# EAGLE board ghettoduino-P (EAGLE 6.1)
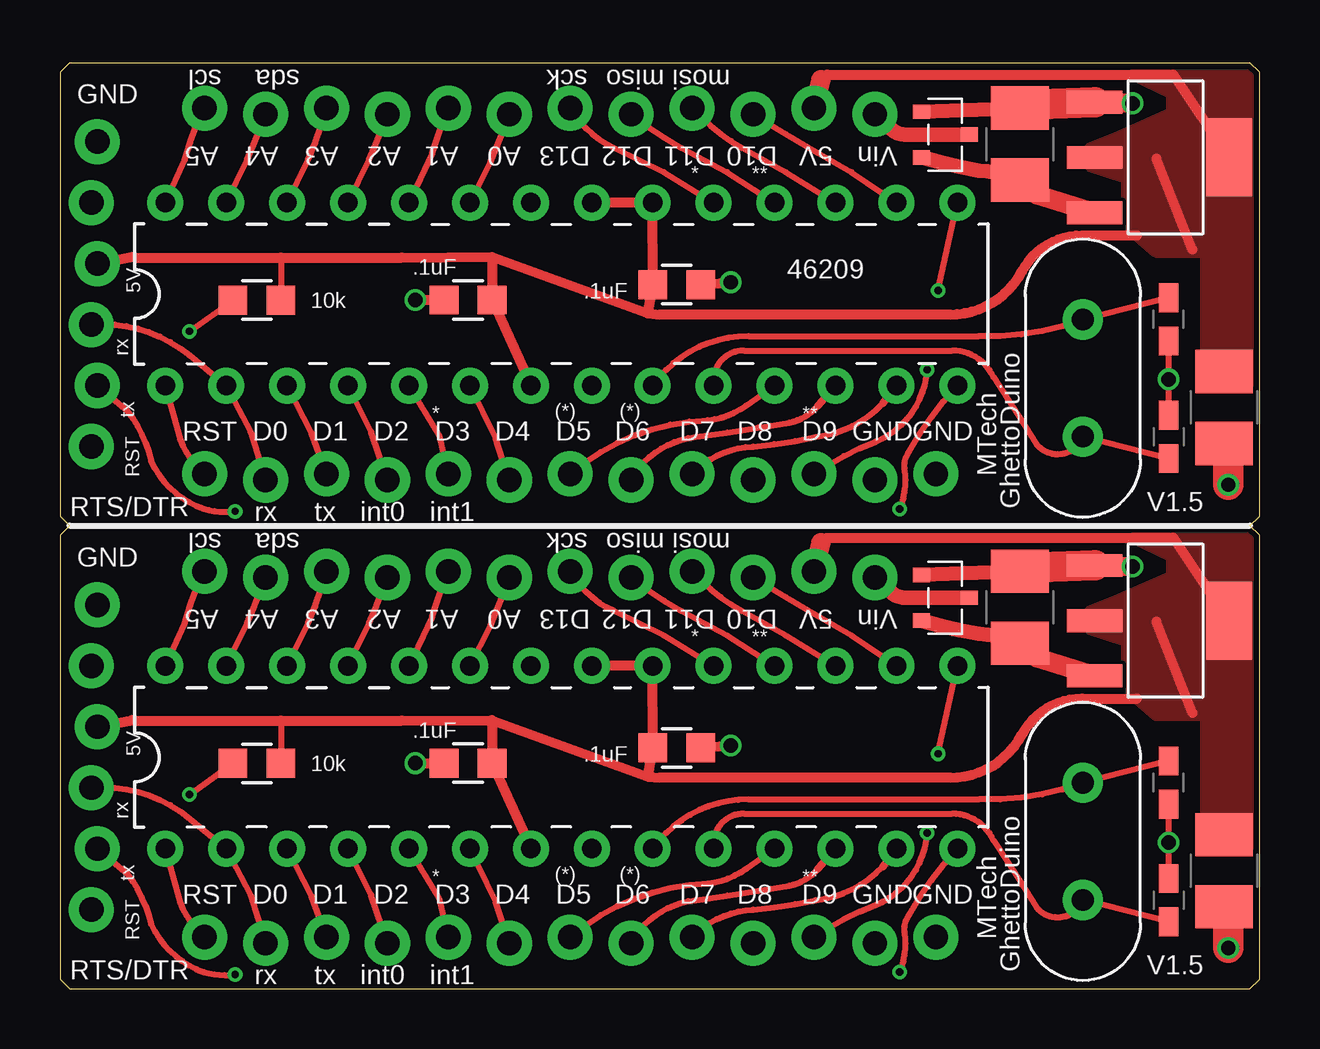
[diagram p0: board, top side]
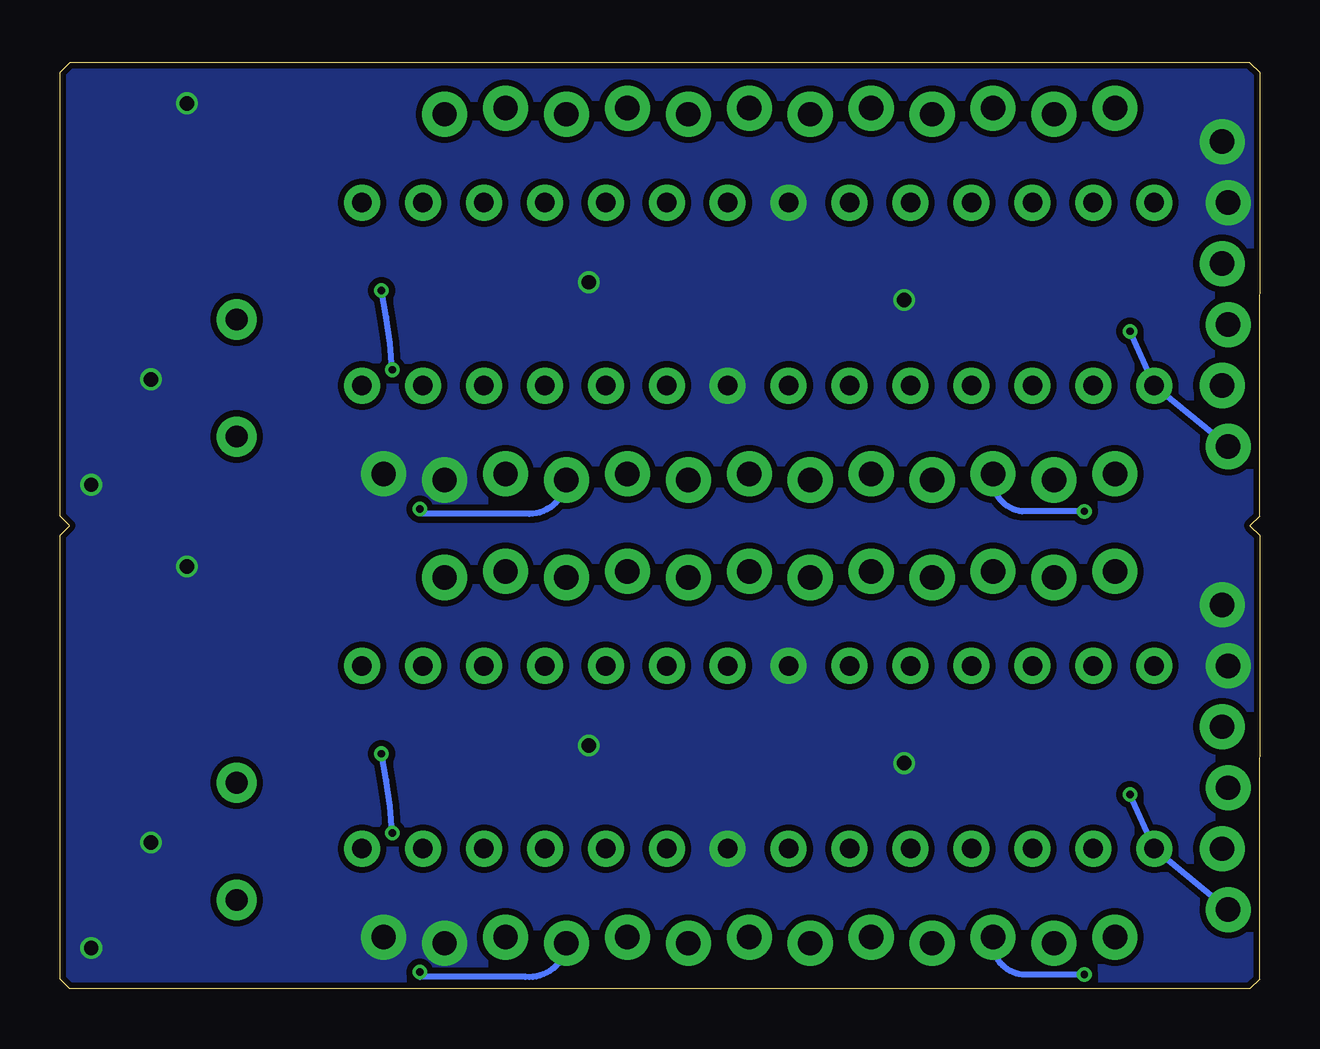
[diagram p1: board, bottom side, seen from below]

Size 50 x 38.6 mm. Coordinates in mm from the lower left corner, seen from the top.
Outline: 0.4,19.3 0,18.9 0,0.4
Outline: 0.4,0 0.4,0
Outline: 0.4,0 49.6,0
Outline: 50,0.4 50,0.4
Outline: 50,0.4 50,18.9 49.6,19.3 50,19.7
Outline: 49.6,0 50,0.4
Outline: 0,0.4 0.4,0
Outline: 0,19.7 0,38.2 0.4,38.6 49.6,38.6 50,38.2 50,19.7
Outline: 0.4,19.3 0.4,19.3
Outline: 50,19.7 50,19.7
Outline: 0,19.7 0.4,19.3
Copper layers (1*16): Top 0.035mm / dielectric 1.5mm / Bottom 0.035mm
Design rules: minimum track width 6mil, minimum drill 12mil, track to track 6mil, track to pad 6mil, pad to pad 6mil, via to via 6mil, smd to smd 0mil, copper to edge 10mil, drill to drill 10mil, minimum pad ring 10mil, minimum via ring 6mil, stop-mask expansion 2mil, vias tented up to drill 100mil, thermal gap 10mil

## Footprints (pad centres in the part's own frame; a part is rotated, then mirrored left to right if it is on the bottom)
ZLDO1117 = smd 0.95 x 2.3: 1 -2.3,-3; 2 0,-3; 3 2.3,-3 | smd 3.25 x 1.9: 4 0,2.6
0603-CAP = smd 1.2 x 0.8: 1 -0.9,0; 2 0.9,0
0805 = smd 1.2 x 1.2: 1 -1,0; 2 1,0
1206 = smd 1.8 x 2.4: 1 -1.5,0; 2 1.5,0
DIL28-3 = drill 0.813 pad 1.5: 1 -16.51,-3.81; 2 -13.97,-3.81; 3 -11.43,-3.81; 4 -8.89,-3.81; 5 -6.35,-3.81; 6 -3.81,-3.81; 7 -1.27,-3.81; 8 1.27,-3.81; 9 3.81,-3.81; 10 6.35,-3.81; 11 8.89,-3.81; 12 11.43,-3.81; 13 13.97,-3.81; 14 16.51,-3.81; 15 16.51,3.81; 16 13.97,3.81; 17 11.43,3.81; 18 8.89,3.81; 19 6.35,3.81; 20 3.81,3.81; 21 1.27,3.81; 22 -1.27,3.81; 23 -3.81,3.81; 24 -6.35,3.81; 25 -8.89,3.81; 26 -11.43,3.81; 27 -13.97,3.81; 28 -16.51,3.81
1X06_LOCK = drill 1.016 pad 1.88: 1 0,0.127; 2 2.54,-0.127; 3 5.08,0.127; 4 7.62,-0.127; 5 10.16,0.127; 6 12.7,-0.127
HC49US = drill 0.9 pad 1.676: 1 -2.44,0; 2 2.44,0
1X13_LOCK = drill 1.016 pad 1.88: 1 0,0.127; 2 2.54,-0.127; 3 5.08,0.127; 4 7.62,-0.127; 5 10.16,0.127; 6 12.7,-0.127; 7 15.24,0.127; 8 17.78,-0.127; 9 20.32,0.127; 10 22.86,-0.127; 11 25.4,0.127; 12 27.94,-0.127; 13 30.48,0.127
SOT23-3LEAD = smd 0.6 x 0.7: 1 0.95,1; 2 -0.95,1; 3 0,-1
1X12_LOCK = drill 1.016 pad 1.88: 1 0,0.127; 2 2.54,-0.127; 3 5.08,0.127; 4 7.62,-0.127; 5 10.16,0.127; 6 12.7,-0.127; 7 15.24,0.127; 8 17.78,-0.127; 9 20.32,0.127; 10 22.86,-0.127; 11 25.4,0.127; 12 27.94,-0.127

## Placement (x,y rotation side)
5V  5V-LDO-ZLDO1117  [ZLDO1117]  46.13,15.35 270 top
5V1  5V-LDO-ZLDO1117  [ZLDO1117]  46.13,34.65 270 top
C1  18pF  [0603-CAP]  46.21,8.6 90 top
C2  .1uF  [0805]  25.71,10.05 180 top
C3  18pF  [0603-CAP]  46.21,3.7 270 top
C4  .1uF  [0805]  17.01,9.41 180 top
C5  10uF  [1206]  48.51,4.93 270 top
C6  18pF  [0603-CAP]  46.21,23 270 top
C7  18pF  [0603-CAP]  46.21,27.9 90 top
C8  10uF  [1206]  40.01,15.9 90 top
C9  .1uF  [0805]  25.71,29.35 180 top
C10  .1uF  [0805]  17.01,28.71 180 top
C11  10uF  [1206]  48.51,24.23 270 top
C12  10uF  [1206]  40.01,35.2 90 top
IC1  [DIL28-3]  20.9,9.65 0 top
IC2  [DIL28-3]  20.9,28.95 0 top
JP1  [1X06_LOCK]  1.43,3.3 90 top
JP2  [1X06_LOCK]  1.43,22.6 90 top
R1  10k  [0805]  8.21,9.4 180 top
R2  10k  [0805]  8.21,28.7 180 top
U$1  HC49US  [HC49US]  42.63,6.15 270 top
U$2  M12  [1X13_LOCK]  6.03,2.03 0 top
U$3  P-MOSFET-PMV48XP  [SOT23-3LEAD]  36.9,16.3 90 top
U$4  HC49US  [HC49US]  42.63,25.45 270 top
U$5  M12  [1X12_LOCK]  6.03,17.27 0 top
U$6  M12  [1X13_LOCK]  6.03,21.33 0 top
U$7  M12  [1X12_LOCK]  6.03,36.57 0 top
U$8  P-MOSFET-PMV48XP  [SOT23-3LEAD]  36.9,35.6 90 top

## Library data of the parts
5V 5V1 C1-C12 IC1 IC2 JP1 JP2 R1 R2 U$1-U$8 = 1dah

## Nets
5V: 5V.2 5V.4 C2.2 C4.1 C5.1 IC1.7 IC1.20 IC1.21 JP1.4 R1.1 U$5.11
5V1: 5V1.2 5V1.4 C9.2 C10.1 C11.1 IC2.7 IC2.20 IC2.21 JP2.4 R2.1 U$7.11
A0: IC1.23 U$5.6
A1: IC1.24 U$5.5
A2: IC1.25 U$5.4
A3: IC1.26 U$5.3
A4: IC1.27 U$5.2
A5: IC1.28 U$5.1
A6: IC2.28 U$7.1
A7: IC2.27 U$7.2
A8: IC2.26 U$7.3
A9: IC2.25 U$7.4
A10: IC2.24 U$7.5
A11: IC2.23 U$7.6
D0: IC1.2 JP1.3 U$2.2
D1: IC1.3 JP1.2 U$2.3
D2: IC1.4 U$2.4
D3: IC1.5 U$2.5
D4: IC1.6 U$2.6
D5: IC1.11 U$2.7
D6: IC1.12 U$2.8
D7: IC1.13 U$2.9
D8: IC1.14 U$2.10
D9: IC1.15 U$2.11
D10: IC1.16 U$5.10
D11: IC1.17 U$5.9
D12: IC1.18 U$5.8
D13: IC1.19 U$5.7
D14: IC2.4 U$6.4
D15: IC2.5 U$6.5
D16: IC2.6 U$6.6
D17: IC2.11 U$6.7
D18: IC2.12 U$6.8
D19: IC2.13 U$6.9
D20: IC2.14 U$6.10
D21: IC2.15 U$6.11
D22: IC2.16 U$7.10
D23: IC2.17 U$7.9
D24: IC2.18 U$7.8
D25: IC2.19 U$7.7
D26: IC2.2 JP2.3 U$6.2
D27: IC2.3 JP2.2 U$6.3
GND: 5V.1 C1.1 C2.1 C3.1 C4.2 C5.2 C8.2 IC1.8 IC1.22 JP1.5 JP1.6 U$2.12 U$2.13 U$3.1
GND1: 5V1.1 C6.1 C7.1 C9.1 C10.2 C11.2 C12.2 IC2.8 IC2.22 JP2.5 JP2.6 U$6.12 U$6.13 U$8.1
N$1: U$3.3 U$5.12
N$2: U$7.12 U$8.3
RESET: IC1.1 JP1.1 R1.2 U$2.1
RESET1: IC2.1 JP2.1 R2.2 U$6.1
VIN: 5V.3 C8.1 U$3.2
VIN1: 5V1.3 C12.1 U$8.2
XTAL_N: C3.2 IC1.10 U$1.2
XTAL_N1: C6.2 IC2.10 U$4.2
XTAL_P: C1.2 IC1.9 U$1.1
XTAL_P1: C7.2 IC2.9 U$4.1

## Tracks (layer width: path | path; a pad name or v marks a point on that pad's centre or on a via)
5V
  Top 0.254: 9.21,11.18 R1.1
  Top 0.406: 18.01,11.2 14.24,11.18 9.21,11.18 3.12,11.18 3,11.2 JP1.4 | 18.01,11.2 C4.1 IC1.7 | IC1.21 IC1.20 C2.2 24.51,8.85 | 18.01,11.2 24.51,8.85 | 31.73,18.59 arc-53 31.98,18.8 46.4,18.8 5V.4 | 24.51,8.85 25,8.8 37.1,8.8 arc62 40.1,10.6 arc-62 42.6,12.1 44.9,12.1 | 47.2,11.5 45.7,15.3
  Top 0.813: 31.73,18.59 U$5.11
  pour Top (no thermals): 44.16,16.26 42.89,15.75 42.89,14.99 44.42,14.49 44.42,12.46 45.68,11.38 47.71,11.38 47.71,5.93 49.59,5.93 49.59,18.8 44.66,18.8 46.31,18 46.31,17.2
5V1
  Top 0.254: 9.21,30.48 R2.1
  Top 0.406: 18.01,30.5 14.24,30.48 9.21,30.48 3.12,30.48 3,30.5 JP2.4 | 18.01,30.5 C10.1 IC2.7 | IC2.21 IC2.20 C9.2 24.51,28.15 | 18.01,30.5 24.51,28.15 | 31.73,37.89 arc-53 31.98,38.1 46.4,38.1 5V1.4 | 24.51,28.15 25,28.1 37.1,28.1 arc62 40.1,29.9 arc-62 42.6,31.4 44.9,31.4 | 47.2,30.8 45.7,34.6
  Top 0.813: 31.73,37.89 U$7.11
  pour Top (no thermals): 44.16,35.56 42.89,35.05 42.89,34.29 44.42,33.79 44.42,31.76 45.68,30.68 47.71,30.68 47.71,25.23 49.59,25.23 49.59,38.1 44.66,38.1 46.31,37.3 46.31,36.5
A0
  Top 0.254: IC1.23 17.96,15.14 arc4 U$5.6
A1
  Top 0.254: IC1.24 15.52,15.49 arc-3 U$5.5
A2
  Top 0.254: IC1.25 12.88,15.24 arc4 U$5.4
A3
  Top 0.254: IC1.26 10.34,15.24 arc10 U$5.3
A4
  Top 0.254: IC1.27 7.8,15.24 arc4 U$5.2
A5
  Top 0.254: IC1.28 5.2,15.24 arc-11 U$5.1
A6
  Top 0.254: IC2.28 5.2,34.54 arc-11 U$7.1
A7
  Top 0.254: IC2.27 7.8,34.54 arc4 U$7.2
A8
  Top 0.254: IC2.26 10.34,34.54 arc10 U$7.3
A9
  Top 0.254: IC2.25 12.88,34.54 arc4 U$7.4
A10
  Top 0.254: IC2.24 15.52,34.79 arc-3 U$7.5
A11
  Top 0.254: IC2.23 17.96,34.44 arc4 U$7.6
D0
  Top 0.254: U$2.2 7.94,3.91 IC1.2 5.4,7.1 arc44 JP1.3
D1  (via drill 0.3)
  Top 0.254: IC1.3 10.49,3.86 U$2.3 | JP1.2 2.8,4.8 arc-25 3.8,2.7 arc46 6,0.7 arc24 v7.3,0.6
  Bottom 0.254: v7.3,0.6 9.9,0.6 arc92 U$2.3
D2
  Top 0.254: IC1.4 12.98,3.91 U$2.4
D3
  Top 0.254: IC1.5 15.82,3.76 U$2.5
D4
  Top 0.254: IC1.6 18.16,3.66 U$2.6
D5
  Top 0.254: IC1.11 28.6,5 arc-30 27,4.4 arc38 U$2.7
D6
  Top 0.254: 31.6,5 arc-38 30.4,4.3 arc-2 26.5,3.7 arc55 U$2.8
  Top 0.305: 31.6,5 IC1.12
D7
  Top 0.254: 34.3,5.1 arc-40 31.5,3.7 arc-7 28.9,3.3 arc44 U$2.9
  Top 0.305: 34.3,5.1 IC1.13
D8  (via drill 0.3)
  Top 0.254: v35,0.7 arc65 35.1,0.9 arc25 35.2,2.4 arc-40 35.4,3.1 arc-13 IC1.14
  Bottom 0.254: v35,0.7 35,0.5 30.6,0.5 arc-90 U$2.10
D9  (via drill 0.3)
  Top 0.254: v36.6,9.8 IC1.15 | v36.15,6.5 arc-64 34,3.5 arc13 U$2.11
  Bottom 0.254: v36.15,6.5 arc-8 v36.6,9.8
D10
  Top 0.254: IC1.16 32.99,14.73 arc-1 U$5.10
D11
  Top 0.254: IC1.17 30.25,14.73 28.43,15.75 arc-18 U$5.9
D12
  Top 0.254: IC1.18 27.81,14.73 25.89,15.75 arc-9 U$5.8
D13
  Top 0.254: IC1.19 25.17,14.73 23.09,15.75 arc-35 U$5.7
D14
  Top 0.254: IC2.4 12.98,23.21 U$6.4
D15
  Top 0.254: IC2.5 15.82,23.06 U$6.5
D16
  Top 0.254: IC2.6 18.16,22.96 U$6.6
D17
  Top 0.254: IC2.11 28.6,24.3 arc-30 27,23.7 arc38 U$6.7
D18
  Top 0.254: 31.6,24.3 arc-38 30.4,23.6 arc-2 26.5,23 arc55 U$6.8
  Top 0.305: 31.6,24.3 IC2.12
D19
  Top 0.254: 34.3,24.4 arc-40 31.5,23 arc-7 28.9,22.6 arc44 U$6.9
  Top 0.305: 34.3,24.4 IC2.13
D20  (via drill 0.3)
  Top 0.254: v35,20 arc65 35.1,20.2 arc25 35.2,21.7 arc-40 35.4,22.4 arc-13 IC2.14
  Bottom 0.254: v35,20 35,19.8 30.6,19.8 arc-90 U$6.10
D21  (via drill 0.3)
  Top 0.254: v36.6,29.1 IC2.15 | v36.15,25.8 arc-64 34,22.8 arc13 U$6.11
  Bottom 0.254: v36.15,25.8 arc-8 v36.6,29.1
D22
  Top 0.254: IC2.16 32.99,34.03 arc-1 U$7.10
D23
  Top 0.254: IC2.17 30.25,34.03 28.43,35.05 arc-18 U$7.9
D24
  Top 0.254: IC2.18 27.81,34.03 25.89,35.05 arc-9 U$7.8
D25
  Top 0.254: IC2.19 25.17,34.03 23.09,35.05 arc-35 U$7.7
D26
  Top 0.254: U$6.2 7.94,23.21 IC2.2 5.4,26.4 arc44 JP2.3
D27  (via drill 0.3)
  Top 0.254: IC2.3 10.49,23.16 U$6.3 | JP2.2 2.8,24.1 arc-25 3.8,22 arc46 6,20 arc24 v7.3,19.9
  Bottom 0.254: v7.3,19.9 9.9,19.9 arc92 U$6.3
GND  (via drill 0.6)
  Top 0.254: C1.1 v46.21,6.1 C3.1
  Top 0.406: v14.81,9.41 C4.2 | C2.1 v27.96,10.15
  Top 0.61: U$3.1 C8.2
  Top 0.813: 5V.1 v44.71,17.6
  Top 1.27: 5V.1 40.2,17.55 C8.2 | C5.2 48.7,3.27 v48.7,1.71
  pour Bottom (isolate 0.254, no thermals): -5.08,-7.62 62.23,-7.62 62.03,41.69 -5.28,41.69
GND1  (via drill 0.6)
  Top 0.254: C7.1 v46.21,25.4 C6.1
  Top 0.406: v14.81,28.71 C10.2 | C9.1 v27.96,29.45
  Top 0.61: U$8.1 C12.2
  Top 0.813: 5V1.1 v44.71,36.9
  Top 1.27: 5V1.1 40.2,36.85 C12.2 | C11.2 48.7,22.57 v48.7,21.01
  pour Bottom (isolate 0.254, no thermals): -5.08,11.68 62.23,11.68 62.03,60.99 -5.28,60.99
N$1
  Top 0.61: U$5.12 34.5,16.7 arc62 35.3,16.3 U$3.3
N$2
  Top 0.61: U$7.12 34.5,36 arc62 35.3,35.6 U$8.3
RESET  (via drill 0.3)
  Top 0.254: IC1.1 5,3.6 arc29 U$2.1 | v5.4,8.1 R1.2
  Bottom 0.254: JP1.1 IC1.1 v5.4,8.1
RESET1  (via drill 0.3)
  Top 0.254: IC2.1 5,22.9 arc29 U$6.1 | v5.4,27.4 R2.2
  Bottom 0.254: JP2.1 IC2.1 v5.4,27.4
VIN
  Top 0.61: C8.1 arc19 38.3,14.8 arc-6 U$3.2
  Top 0.813: C8.1 40.71,13.8 5V.3
VIN1
  Top 0.61: C12.1 arc19 38.3,34.1 arc-6 U$8.2
  Top 0.813: C12.1 40.71,33.1 5V1.3
XTAL_N
  Top 0.254: C3.2 U$1.2 arc-120 40.7,3.4 arc2 38.9,6.2 arc66 37.2,7.3 28.5,7.3 arc99 IC1.10
XTAL_N1
  Top 0.254: C6.2 U$4.2 arc-120 40.7,22.7 arc2 38.9,25.5 arc66 37.2,26.6 28.5,26.6 arc99 IC2.10
XTAL_P
  Top 0.254: C1.2 U$1.1 arc-23 38.3,7.9 28.7,7.9 arc55 IC1.9
XTAL_P1
  Top 0.254: C7.2 U$4.1 arc-23 38.3,27.2 28.7,27.2 arc55 IC2.9

## Text on the board
tPlace: scl | sda | sck | miso | mosi | GND | A5 | A4 | A3 | A2 | A1 | A0 | D13 | D12 | D11 | D10 | 5V | Vin | * | ** | 46209 | 5V | rx | tx | * | (*) | (*) | ** | RST | D0 | D1 | D2 | D3 | D4 | D5 | D6 | D7 | D8 | D9 | GND | GND | RST | MTech | V1.5 | RTS/DTR | GhettoDuino | scl | rx | sda | tx | int0 | int1 | sck | miso | mosi | GND | A5 | A4 | A3 | A2 | A1 | A0 | D13 | D12 | D11 | D10 | 5V | Vin | ** | * | 5V | rx | (*) | (*) | ** | tx | RST | D0 | D1 | D2 | * | D3 | D4 | D5 | D6 | D7 | D8 | D9 | GND | GND | RST | MTech | GhettoDuino | V1.5 | RTS/DTR | rx | tx | int0 | int1